# Altium PCB Altium_PCB_pH_Interface_Module_2023-11-09.pcbdoc
Units mil, origin at the board's own origin, x right, y up, seen from the top; angles counter-clockwise.
Board outline 5068.58 x 5931.35 mil, 2 copper layers (Top Layer, Bottom Layer); 50 components, 41 nets, 202 pads, 49 vias.
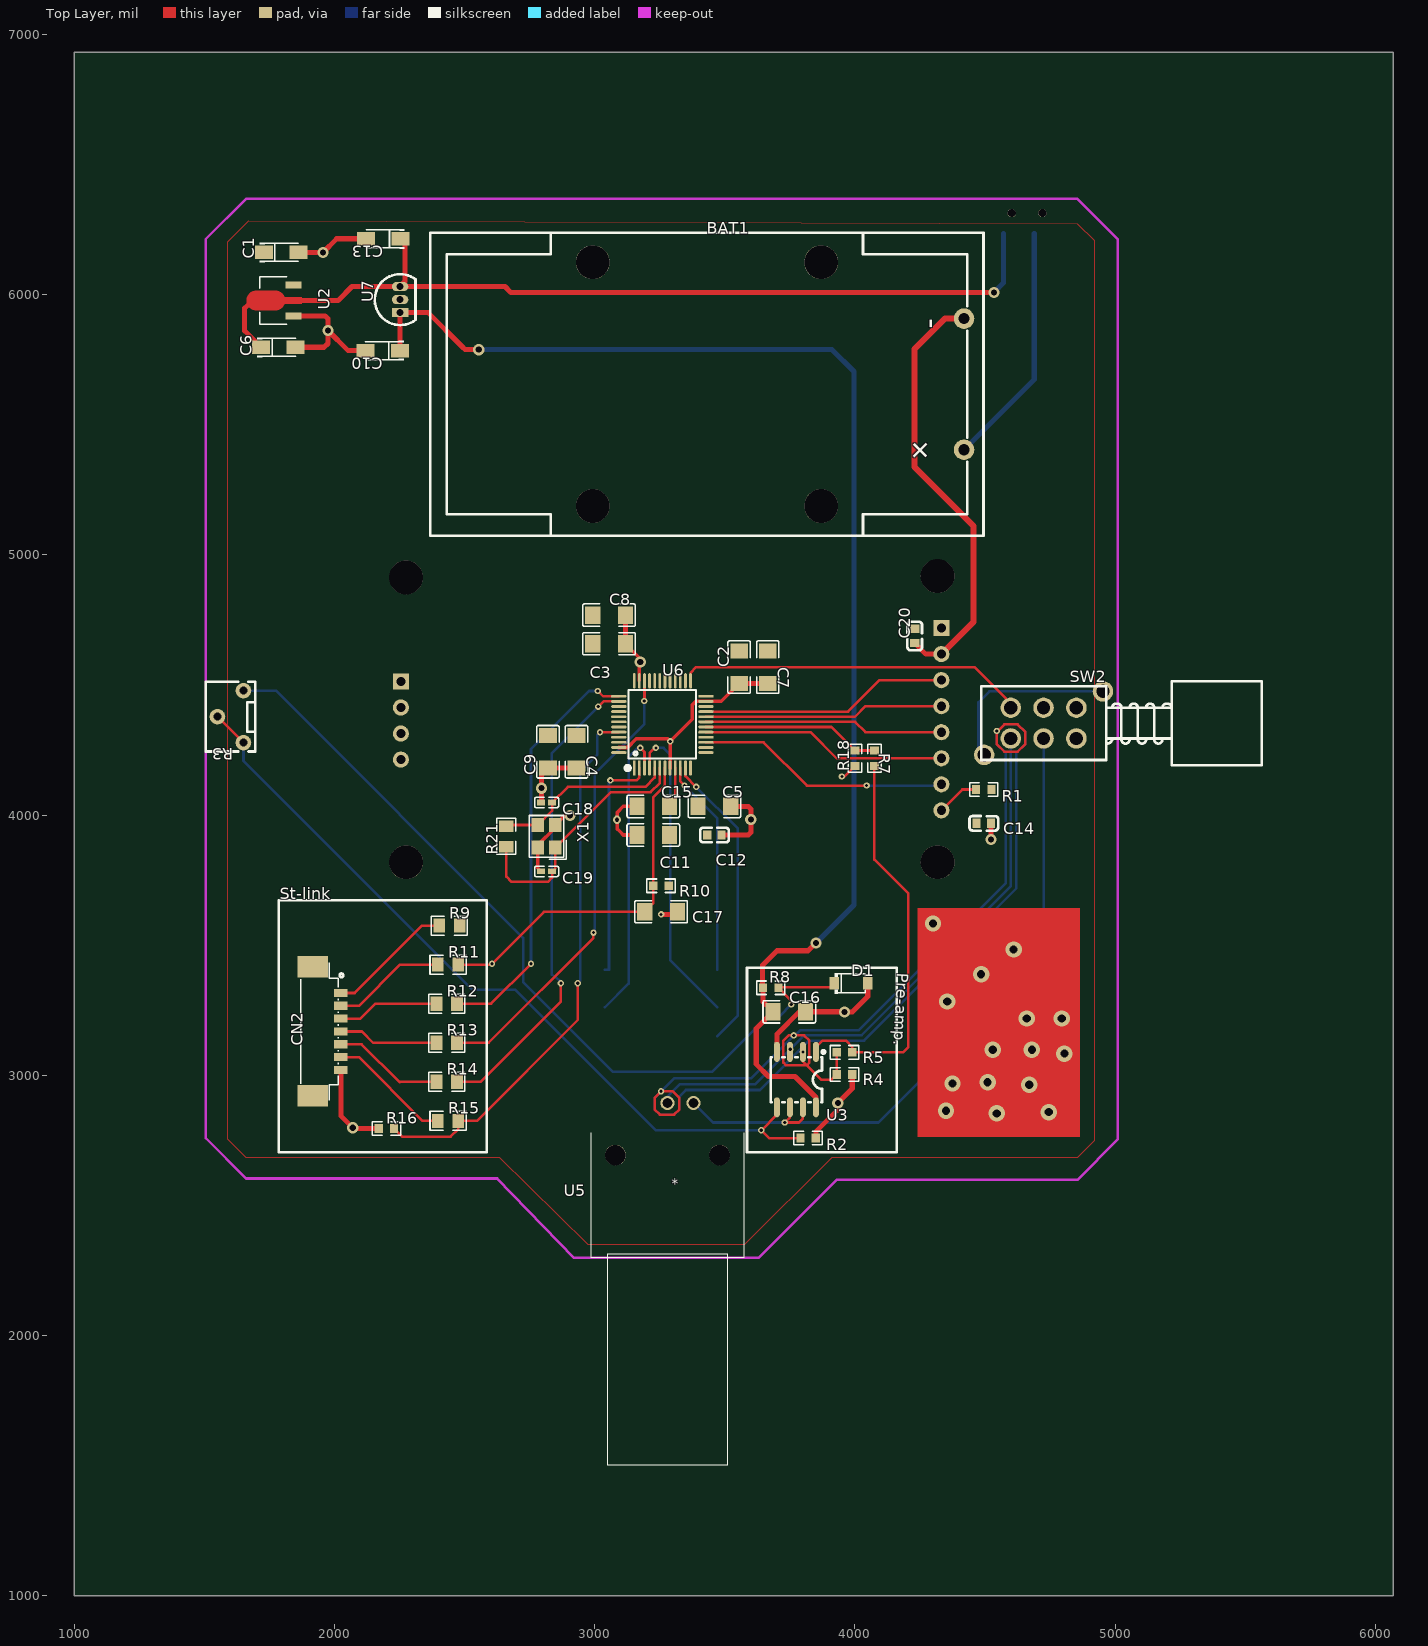
[diagram p0: Top Layer view]
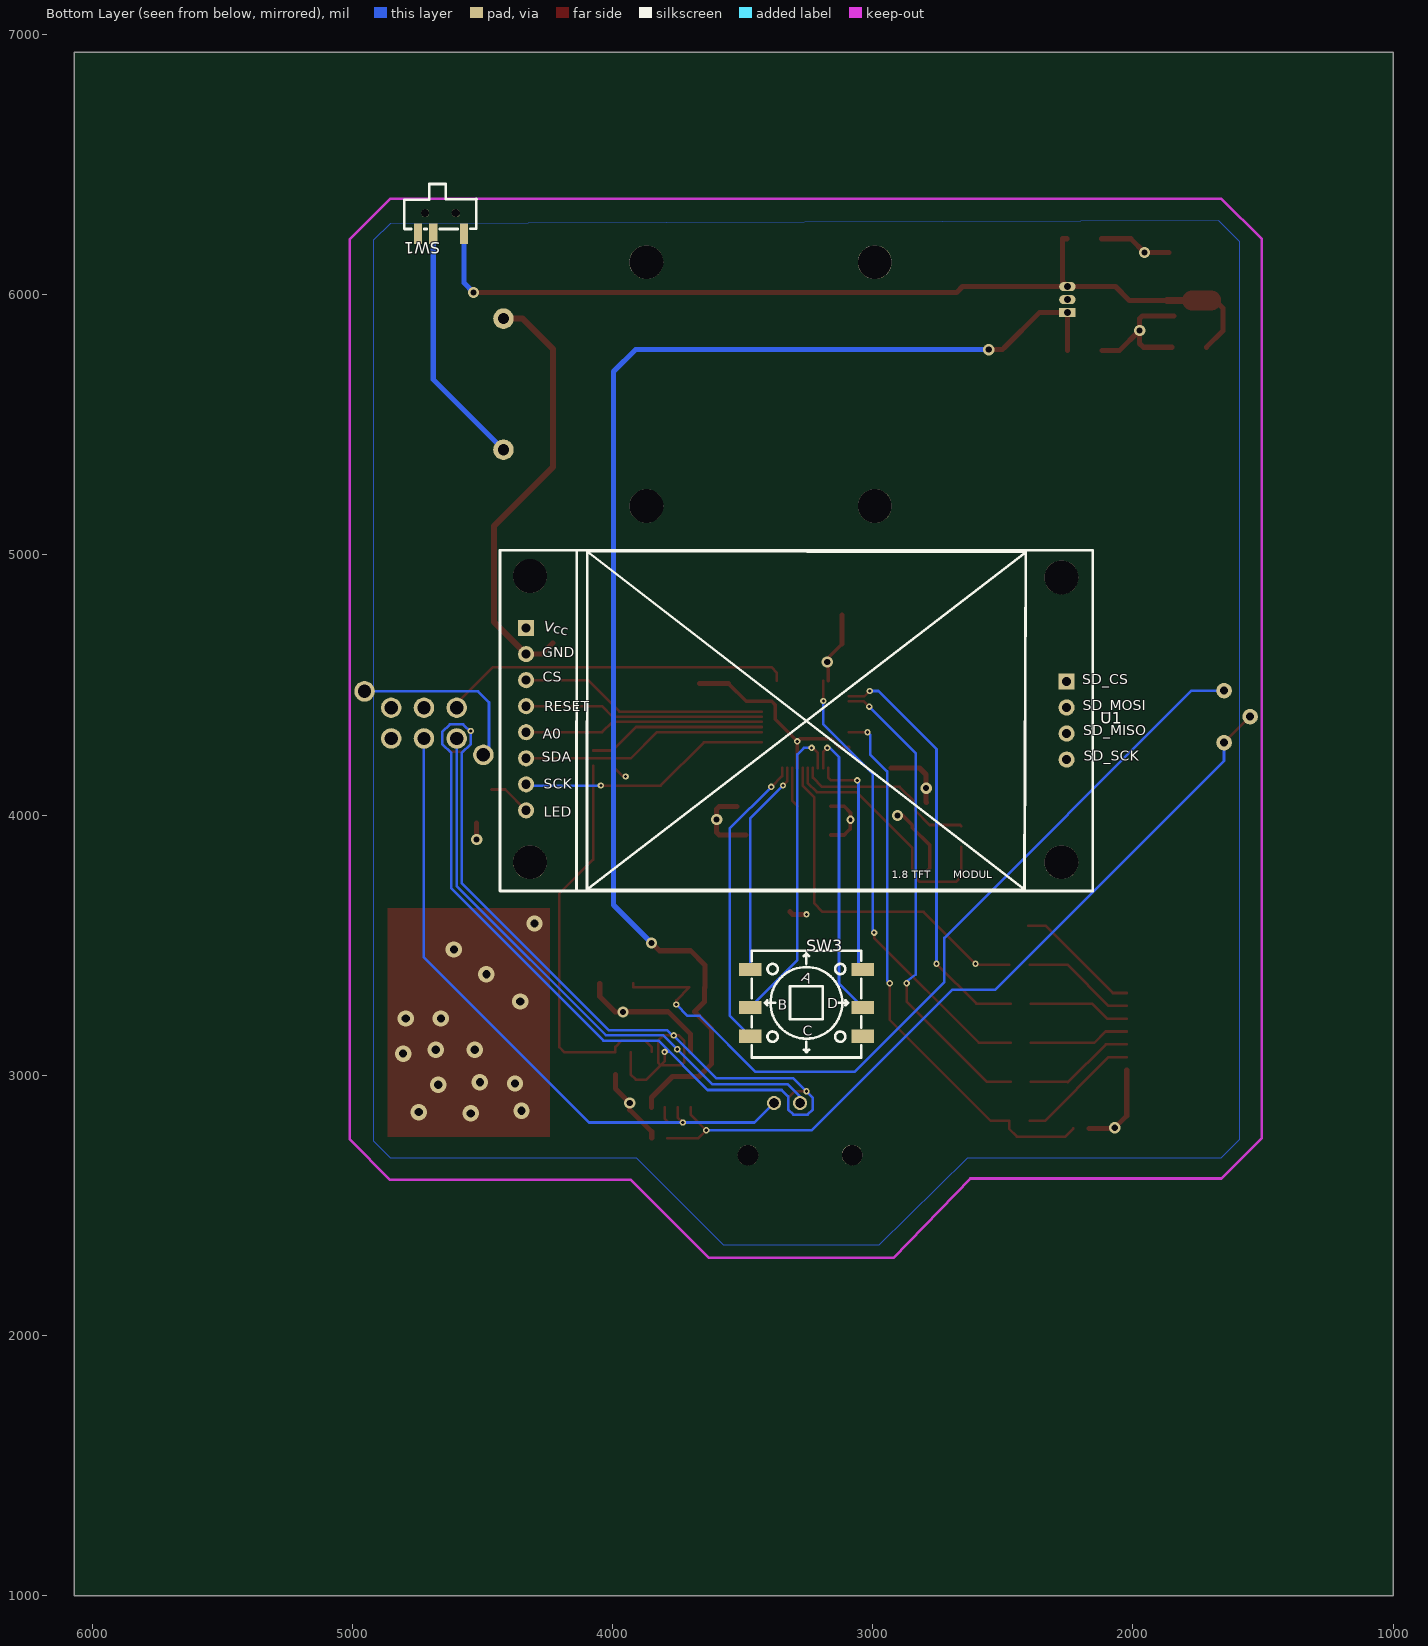
[diagram p1: Bottom Layer view, seen from below]

## Layer stack, top to bottom
Top Layer: signal copper (thickness not stored)
Dielectric: dielectric 12.6, FR-4, Dk 4.8
Bottom Layer: signal copper (thickness not stored)

## Board outline
6068.58,1000 1000,1000 1000,6931.35 6068.58,6931.35

## Components (designator, comment, footprint, x,y, rotation, side; value= is the part's Value field where it differs from the comment)
BAT1 "9V电池盒(BH-1294)" BAT-TH_BH-1294 4419.33,5656.07 r0 top
C1 "10uF" CAP-SMD_L3.2-W1.6-RD-C7171 1794.45,6162.77 r0 top
C2 "100nF" C1206 3555,4568.36 r90 top
C3 "100nF" C1206 3055,4658.36 r180 top
C4 "100nF" C1206 2930,4243.36 r90 top
C5 "100nF" C1206 3460,4033.36 r180 top
C6 "10uF" CAP-SMD_L3.2-W1.6-RD-C7171 1784.45,5797.77 r0 top
C7 "4.7uF" C1206 3665,4568.36 r270 top
C8 "4.7uF" C1206 3055,4768.36 r0 top
C9 "4.7uF" C1206 2820,4243.36 r270 top
C10 "10uF" CAP-SMD_L3.2-W1.6-RD-C7171 2184.69,5784.81 r180 top
C11 "4.7uF" C1206 3225,3923.36 r180 top
C12 "10uF" C0603 3460,3923.36 r180 top
C13 "10uF" CAP-SMD_L3.2-W1.6-RD-C7171 2187.44,6214.73 r180 top
C14 "100nF" C0603 4495,3968.36 r180 top
C15 "100nF" C1206 3225,4033.36 r0 top
C16 "100nF" C1206 3747.68,3243.88 r180 top
C17 "100nF" C1206 3255,3628.36 r180 top
C18 "13pF" C0402 2815,4048.36 r180 top
C19 "13pF" C0402 2815,3783.36 r0 top
C20 "100nF" C0603 4230,4688.36 r90 top
CN2 "53398-0771" CONN-SMD_7P-P1.25_53398-0771 1970,3168.36 r270 top
D1 "LMSZ5223BT1G" SOD-123_L2.7-W1.6-LS3.7-RD 3985,3353.36 r0 top
R1 "100Ω" R0603 4495,4098.36 r180 top
R2 "10kΩ" R0603 3820,2758.36 r180 top
R3 "20kΩ" RES-ADJ-TH_3362X 1600,4378.36 r180 top
R4 "10kΩ" R0603 3960,3003.36 r180 top
R5 "10kΩ" R0603 3960,3088.36 r0 top
R7 "10kΩ" R0603 4075,4218.36 r270 top
R8 "300R" R0603 3676.4,3336.36 r180 top
R9 "22Ω" R0805 2441.15,3574.94 r0 top
R10 "100kΩ" R0603 3255,3728.36 r180 top
R11 "22Ω" R0805 2436.15,3424.94 r0 top
R12 "22Ω" R0805 2431.15,3274.94 r0 top
R13 "22Ω" R0805 2431.15,3124.94 r0 top
R14 "22Ω" R0805 2431.15,2974.94 r0 top
R15 "22Ω" R0805 2436.15,2824.94 r0 top
R16 "10kΩ" R0603 2199.25,2795.45 r0 top
R18 "20kΩ" R0603 4000,4218.36 r270 top
R21 "1MΩ(DNP)" R0805 2660,3918.36 r90 top
SW1 "SSSS810701" SW-SMD_SSSS810701 4659.48,6234.81 r180 bottom
SW2 "PS22F02L-2B1-21" SW-TH_6P_PS22F02L-2B1-21 4725,4353.36 r0 top
SW3 "TM-2027" SW-SMD_6P-P2.80-L10.2-W10.2 3255,3278.36 r0 bottom
U1 "ST7735" "LCD ST7735" 3255,4363.36 r0 bottom
U2 "HT7533-1_C14289" SOT-89-3_L4.5-W2.5-P1.50-LS4.2-BR 1789.45,5977.77 r0 top
U3 "LMC662CMX/NOPB" SOIC-8_L5.0-W4.0-P1.27-LS6.1-BL 3775,2983.36 r180 top
U5 "CONN_CONBN_LNX" CONN_CONBN_LNX 3290,2578.36 r180 top
U6 "STM32F030CCT6" LQFP-48_L7.0-W7.0-P0.50-LS9.0-BL 3260,4348.36 r0 top
U7 "LM78L05ACZ/NOPB" TO-92-3_L4.9-W3.7-P1.27-L 2252.05,5981 r90 top
X1 "16MHz" CRYSTAL-SMD_4P-L3.2-W2.5-BL 2815,3918.36 r90 top

## Footprints (in the part's own frame and the unit in brackets; to place one, negate y for a bottom-side part, rotate by r counter-clockwise, add the part's x,y. Pads: shape width x height; smd on the part's side, far side on the other; paste and mask are expansions set on the pad)
BAT-TH_BH-1294 [mm]
  round 2 hole 1.1 paste+0 mask+0.05: 1(0,-6.4) 2(0,6.4)
  round 3.3 hole 3.3 unplated paste+0: ""(-36.249,-11.9) ""(-36.249,11.9) ""(-13.948,-11.9) ""(-13.948,11.9)
  silkscreen extent -52.1,-14.8 1.9,14.8
C0402 [mm]
  rect 0.79x0.54 smd paste-100 mask+0.051: 1(-0.545,0) 2(0.545,0)
  silkscreen extent -1.17,-0.5 1.17,0.5
C0603 [mm]
  rect 0.8x0.9 smd paste+0 mask+0.051: 1(-0.7,0) 2(0.7,0)
  silkscreen extent -1.41,-0.71 1.39,0.72
C1206 [mm]
  rect 1.485x1.728 smd paste-100 mask+0.051: 1(-1.593,0) 2(1.593,0)
  silkscreen extent -2.56,-1.09 2.56,1.09
CAP-SMD_L3.2-W1.6-RD-C7171 [mil]
  rect 69.19x51.02 smd paste+0 mask+2: 1(-66.39,0) 2(66.39,0)
  silkscreen extent -81,-37 66,37
CONN-SMD_7P-P1.25_53398-0771 [mm]
  rect 0.8x1.3 smd paste+0 mask+0.051: 1(-3.75,1.375) 2(-2.5,1.375) 3(-1.25,1.375) 4(0,1.375) 5(1.25,1.375) 6(2.5,1.375) 7(3.75,1.375)
  rect 2.1x3 smd paste+0 mask+0.051: 8(6.3,-1.375) 9(-6.3,-1.375)
  silkscreen extent -6.73,-2.54 6.73,1.61
CONN_CONBN_LNX [mil]
  round 55 hole 35 slot 35.2 at 0 deg paste+0 mask+2: 1(-89.5,-315) 2(10.5,-315)
  round 79 hole 79 unplated paste+0: ""(-189.5,-115) ""(210.5,-115)
  silkscreen extent -285,-200 305,1076
CRYSTAL-SMD_4P-L3.2-W2.5-BL [mm]
  rect 1.4x1.2 smd paste+0 mask+0.051: 1(-1.1,-0.85) 2(1.1,-0.85) 3(1.1,0.85) 4(-1.1,0.85)
  silkscreen extent -2.26,-1.91 2.03,1.68
"LCD ST7735" [mil]
  rect 62.01x62.01 hole 35 paste+0 mask+2: 1(1077.5,-355) 9(-1000,-150)
  round 62.01 hole 35 paste+0 mask+2: 2(1077.5,-255) 3(1077.5,-155) 4(1077.5,-55) 5(1077.5,45) 6(1077.5,145) 7(1077.5,245) 8(1077.5,345) 10(-1000,-50) 11(-1000,50) 12(-1000,150)
  round 129.92 hole 129.92 unplated paste+0: ""(-980,-550) ""(-980,545) ""(1062.5,-555) ""(1062.5,545)
  silkscreen extent -1100,-655 1178,655
LQFP-48_L7.0-W7.0-P0.50-LS9.0-BL [mm]
  oval 0.27x1.5 smd paste+0 mask+0.05: 1(-2.75,-4.25) 2(-2.25,-4.25) 3(-1.75,-4.25) 4(-1.25,-4.25) 5(-0.75,-4.25) 6(-0.25,-4.25) 7(0.25,-4.25) 8(0.75,-4.25) 9(1.25,-4.25) 10(1.75,-4.25) 11(2.25,-4.25) 12(2.75,-4.25) 25(2.75,4.25) 26(2.25,4.25) 27(1.75,4.25) 28(1.25,4.25) 29(0.75,4.25) 30(0.25,4.25) 31(-0.25,4.25) 32(-0.75,4.25) 33(-1.25,4.25) 34(-1.75,4.25) 35(-2.25,4.25) 36(-2.75,4.25)
  oval 1.5x0.27 smd paste+0 mask+0.05: 13(4.25,-2.75) 14(4.25,-2.25) 15(4.25,-1.75) 16(4.25,-1.25) 17(4.25,-0.75) 18(4.25,-0.25) 19(4.25,0.25) 20(4.25,0.75) 21(4.25,1.25) 22(4.25,1.75) 23(4.25,2.25) 24(4.25,2.75) 37(-4.25,2.75) 38(-4.25,2.25) 39(-4.25,1.75) 40(-4.25,1.25) 41(-4.25,0.75) 42(-4.25,0.25) 43(-4.25,-0.25) 44(-4.25,-0.75) 45(-4.25,-1.25) 46(-4.25,-1.75) 47(-4.25,-2.25) 48(-4.25,-2.75)
  silkscreen extent -3.59,-4.46 3.3,3.34
R0603 [mil]
  rect 31.75x34.02 smd paste-3937.01 mask+2: 1(-29.65,0) 2(29.65,0)
  silkscreen extent -55,-26 55,26
R0805 [mil]
  rect 44.59x54.21 smd paste-3937.01 mask+2: 1(-39.37,0) 2(39.37,0)
  silkscreen extent -69,-36 69,36
RES-ADJ-TH_3362X [mil]
  round 60 hole 30 paste+0 mask+2: 1(-50,-100) 2(50,0) 3(-50,100)
  silkscreen extent -94,-134 94,134
SOD-123_L2.7-W1.6-LS3.7-RD [mm]
  rect 0.91x1.22 smd paste+0 mask+0.051: 1(-1.635,0) 2(1.635,0)
  silkscreen extent -1.6,-1 1.38,1
SOIC-8_L5.0-W4.0-P1.27-LS6.1-BL [mil]
  oval 22.38x76.78 smd paste+0 mask+2: 1(-75,-106.5) 2(-25,-106.5) 3(25,-106.5) 4(75,-106.5) 5(75,106.5) 6(25,106.5) 7(-25,106.5) 8(-75,106.5)
  silkscreen extent -110,-112 98,87
SOT-89-3_L4.5-W2.5-P1.50-LS4.2-BR [mm]
  rect 1.575x0.672 smd paste+0 mask+0.051: 1(1.356,-1.5) 3(1.356,1.5)
  Top Layer region: -2.283,0.95 -0.429,0.95 -0.384,0.949 -0.34,0.946 -0.296,0.94 -0.252,0.933 -0.208,0.924 -0.165,0.912 -0.123,0.899 -0.081,0.884 -0.04,0.866 0,0.847 0.04,0.826 0.078,0.803 0.115,0.779 0.151,0.752 0.185,0.724 0.219,0.695 0.251,0.664 0.281,0.631 0.31,0.597 0.337,0.562 0.362,0.525 0.386,0.488 0.408,0.449 0.428,0.409 0.447,0.33 2.144,0.33 2.144,-0.33 0.447,-0.33 0.428,-0.409 0.408,-0.449 0.386,-0.488 0.362,-0.526 0.337,-0.562 0.31,-0.597 0.281,-0.631 0.251,-0.664 0.219,-0.695 0.185,-0.725 0.151,-0.753 0.115,-0.779 0.078,-0.804 0.04,-0.827 0,-0.848 -0.04,-0.867 -0.081,-0.884 -0.123,-0.899 -0.165,-0.913 -0.208,-0.924 -0.252,-0.934 -0.296,-0.941 -0.34,-0.946 -0.384,-0.949 -0.429,-0.95 -2.283,-0.95 -2.328,-0.949 -2.372,-0.946 -2.416,-0.941 -2.46,-0.934 -2.504,-0.924 -2.547,-0.913 -2.589,-0.899 -2.631,-0.884 -2.672,-0.867 -2.713,-0.848 -2.752,-0.827 -2.79,-0.804 -2.827,-0.779 -2.863,-0.753 -2.898,-0.725 -2.931,-0.695 -2.963,-0.664 -2.993,-0.631 -3.022,-0.597 -3.049,-0.562 -3.075,-0.526 -3.098,-0.488 -3.12,-0.449 -3.141,-0.409 -3.159,-0.369 -3.175,-0.327 -3.189,-0.285 -3.202,-0.242 -3.212,-0.199 -3.22,-0.155 -3.227,-0.111 -3.231,-0.067 -3.233,-0.022 -3.233,0.022 -3.231,0.067 -3.227,0.111 -3.22,0.155 -3.212,0.199 -3.202,0.242 -3.189,0.285 -3.175,0.327 -3.159,0.369 -3.141,0.409 -3.12,0.449 -3.098,0.488 -3.075,0.525 -3.049,0.562 -3.022,0.597 -2.993,0.631 -2.963,0.664 -2.931,0.695 -2.898,0.724 -2.863,0.752 -2.827,0.779 -2.79,0.803 -2.752,0.826 -2.713,0.847 -2.672,0.866 -2.631,0.884 -2.589,0.899 -2.547,0.912 -2.504,0.924 -2.46,0.933 -2.416,0.94 -2.372,0.946 -2.328,0.949
  silkscreen extent -1.95,-2.33 0.7,2.33
SW-SMD_6P-P2.80-L10.2-W10.2 [mm]
  rect 2.2x1.3 smd paste+0 mask+0.051: 1(5.5,-3.25) 2(5.5,0.45) 3(5.5,3.25) 4(-5.5,3.25) 5(-5.5,0.45) 6(-5.5,-3.25)
  silkscreen extent -5.35,-5.08 5.33,5.33
SW-SMD_SSSS810701 [mm]
  rect 0.8x2 smd paste+0 mask+0.051: 1(2.25,0) 2(-0.75,0) 3(-2.25,0)
  round 0.8 hole 0.8 unplated paste+0: ""(-1.552,2.003) ""(1.45,2)
  silkscreen extent -3.59,0.44 3.47,4.86
SW-TH_6P_PS22F02L-2B1-21 [mm]
  round 2 hole 1.3 paste+0 mask+0.051: 1(-3.2,-1.5) 2(0,-1.5) 3(3.2,-1.5) 4(-3.2,1.5) 5(0,1.5) 6(3.2,1.5) M(-5.8,-3.1) M(5.8,3.1)
  silkscreen extent -6.1,-4.1 21.3,4.1
TO-92-3_L4.9-W3.7-P1.27-L [mm]
  rect 0.9x1.6 hole 0.7 paste+0 mask+0.051: 1(-1.27,0)
  oval 0.9x1.6 hole 0.7 paste+0 mask+0.051: 2(0,0) 3(1.27,0)
  silkscreen extent -2.48,-1.5 2.48,2.48

## Free pads (board coordinates)
  round 24.41 hole 12.2 paste+0 mask+2: ""(3255,2938.36) ""(3730,2818.36) ""(3751.22,3099.78) ""(3765,3153.36) ""(3800,3089.86) ""(4545,4323.36)

## Via types
v1: diameter 24.41, hole 12.2, Top Layer to Bottom Layer, tented both sides, 20 vias
v2: diameter 62.99, hole 31.5, Top Layer to Bottom Layer, tented both sides, 15 vias
v3: diameter 43.31, hole 23.62, Top Layer to Bottom Layer, tented both sides, 13 vias
v4: diameter 31.5, hole 15.75, Top Layer to Bottom Layer, tented both sides, 1 vias

## Nets (pads, with @x,y where several pads share a name; then routed paths per layer and width w, separated by ;. In a path a pad name is that pad's centre, name@x,y a point inside that pad or via, vN(x,y) a via of type N, cw(c..) or ccw(c..) an arc to the next point about the centre after c; other vN are vias at no path point)
3.3V: C1.1 C2.2 C3.2 C4.2 C5.2 C7.1 C8.1 C9.1 C11.1 C12.2 C14.2 C15.2 C20.2 R1.1 R9.2 R10.1 U1.1 U2.3 U6.1 U6.9 U6.24 U6.36 U6.48 | length 156.6
  Top Layer w10: C15.2 3309.21,4054.87 U6.9
+5V: C10.1 C16.2 R8.2 U3.8 U7.1 | length 5222.8
  Top Layer w19.68: C10.1@2251.1,5784.86 U7.1 ; U7.1 2359.82,5931 2491.86,5798.96 ; 2491.81,5798.99 2502.01,5788.79 v3(2554.41,5788.79) ; R8.2@3645.34,3338.36 3645.34,3423.7 3700,3478.36 3820,3478.36 v3(3850,3508.36) ; R8.2@3646.76,3336.39 3646.76,3282.09 C16.2 3620.51,3179.4 3620.51,3042.69 3667.75,2995.45 3769.33,2995.45 3850,2914.78 U3.8
  Bottom Layer w19.68: v3(2554.41,5788.79) 3912.2,5788.76 3996.1,5704.86 3996.1,5678.16 ; v3(3850,3508.36) 3996.1,3654.46 3996.1,5678.36
ADC1_IN8: R5.2 R7.2 U3.1 | length 1556.8
  Top Layer w10: U3.1 3850,3108.36 3875,3133.36 3965,3133.36 3989.7,3108.66 R5.2 4185,3088.36 4205,3108.36 4205,3698.36 4075,3828.36 R7.2
BLTX: R14.2 U6.38 | length 1838.9
  Top Layer w10: R14.2 2561.58,2974.94 2870,3283.36 v1(2870,3353.36) ; v1(3013.82,4416.71) 3034.05,4436.94 U6.38
  Bottom Layer w10: v1(2870,3353.36) 2868.7,3361.86 2835,3386.96 2835,4237.89 v1(3013.82,4416.71)
BOOT0: R15.2 R16.2 U6.44 | length 2136.4
  Top Layer w10: R16.2@2228.9,2795.46 2260,2764.36 2445.6,2764.36 2475.5,2794.36 R15.2@2475.5,2825.36 ; R15.2@2475.5,2824.96 2546.6,2824.96 2935,3213.36 v1(2935,3353.36) ; v1(3020,4318.36) 3020.47,4318.83 U6.44
  Bottom Layer w10: v1(2935,3353.36) 2945,3363.36 2945,4168.36 3010,4233.36 3010,4308.36 v1(3020,4318.36)
D1_1: D1.1 R3.1 R8.1 | length 3237
  Top Layer w10: v1(3755.16,3271.83) 3755.16,3287.86 3704.66,3338.36 3920.63,3338.36 D1.1
  Bottom Layer w10: R3.1 1775,4478.36 2725,3528.36 2725,3358.36 3070,3013.36 3450,3013.36 3665,3228.36 3711.69,3228.36 v1(3755.16,3271.83)
DOWN: SW3.3 U6.11 | length 1146.6
  Top Layer w10: U6.11 3348.58,4149.78 v1(3390,4108.36)
  Bottom Layer w10: v1(3390,4108.36) 3550,3948.36 3550,3228.88 SW3.3
GND: BAT1.2 C1.2 C2.1 C3.1 C4.1 C5.1 C6.2 C7.2 C8.2 C9.2 C10.2 C11.2 C12.1 C13.2 C14.1 C15.1 C16.1 C17.1 C18.2 C19.1 C20.1 CN2.7 D1.2 R2.1 R4.1 R16.1 R18.2 SW2.5 SW3.4 U1.2 U2.1 U3.4 U6.8 U6.23 U6.35 U6.47 U7.2 X1.2 X1.4 | length 6019
  Top Layer w10: v1(3950,4148.36) 3959.66,4148.36 R18.2
  Top Layer w13.78: X1.4 2781.5,3884.86 2848.5,3951.86 X1.2 2885.2,3998.36 v3(2905,3998.36) ; X1.4 2781.53,3795.37 C19.1 ; v4(3085.75,3981.91) 3085.75,4009.11 3110,4033.36 C15.1 ; v4(3085.75,3981.91) 3085.8,3947.66 3097.8,3935.56 3110,3923.36 C11.2 ; U6.47 3126.4,4259.76 3160,4293.36 3280,4293.36 v1(3290,4283.36) ; C3.1 3175,4601.06 v3(3175,4588.36) 3171.42,4584.78 U6.35 ; U6.8@3289.5,4181.06 3290,4181.56 v1(3290,4283.36) ; C2.1 3486.28,4436.94 U6.23 3388.6,4436.96 3375,4423.36 3375,4368.36 v1(3290,4283.36)
  Top Layer w19.68: U2.1 1963.5,5918.72 1974.45,5907.77 v3(1974.45,5862.77) ; C6.2@1850.85,5797.77 1959.45,5797.77 1974.45,5812.77 v3(1974.45,5862.77) ; C1.2 1861.63,6161.97 v3(1955.55,6161.98) ; v3(1955.55,6161.98) 2008.31,6214.73 C13.2 ; CN2.7 2024.13,2844.23 v3(2070,2798.36) 2072.91,2795.45 R16.1@2169.59,2795.45 ; C10.2 2052.4,5784.81 v3@1974.45,5862.77 ; C18.2 2795,4049.82 v3(2795,4103.36) 2795,4155.66 C9.2 C4.1 ; C3.1 C8.2 ; v1(3255,3618.36) 3307.7,3618.36 C17.1 ; C12.1 3590,3923.36 3600,3933.36 v3(3600,3983.36) 3600,4023.36 3590,4033.36 C5.1 ; C2.1 C7.2 ; U3.4 3700,3157.66 3786.3,3243.86 C16.1 3959.49,3243.87 v3(3960,3243.36) 3990,3243.36 4049.37,3302.73 D1.2 ; R2.1 3849.7,2782.86 3934.3,2867.46 v3(3934.29,2893.48) 3989.5,2948.66 R4.1@3989.5,3003.36 ; C20.1 4272.44,4618.36 U1.2 ; v3(4522.56,3905.8) C14.1
  Top Layer w23.62: U1.2 4456.3,4742.16 4456.3,5110.76 4229.6,5337.56 4229.6,5791.46 4346.1,5908.06 BAT1.2@4419.3,5908.06
  other v2: 4545,2853.36 4745,2858.36 4350,2863.36 4670,2963.36 4375,2968.36 4510,2973.36 4805,3083.36 4530,3098.36 4680,3098.36 4660,3218.36 4795,3218.36 4355,3283.36 4485,3388.36 4610,3483.36 4300,3583.36
LEFT: SW3.2 U6.4 | length 1203.5
  Top Layer w10: U6.4@3210.8,4181.06 3210.8,4239.16 3230,4258.36 v1(3235,4258.36)
  Bottom Layer w10: v1(3235,4258.36) 3265,4258.36 3290,4233.36 3290,3442.17 SW3.2
NRST: C17.2 R10.2 R11.2 U6.7 | length 1385.7
  Top Layer w10: R11.2 2601.58,3424.94 v1(2605,3428.36) 2805,3628.36 C17.2 3225.34,3661.4 R10.2 ; R10.2 3225.3,4068.66 3269.8,4113.56 U6.7@3269.8,4181.06
OPAMP-CALIB: SW2.4 U6.25 | length 1345.2
  Top Layer w10: U6.25 3368.3,4546.66 3390,4568.36 4460,4568.36 4599,4429.36 SW2.4@4599,4412.46
OSC-IN: C18.1 R21.2 U6.5 X1.3 | length 703.4
  Top Layer w10: R21.2 2663.94,3961.67 X1.3 2836.46,4016.6 C18.1 ; C18.1 2896.5,4108.36 3195,4108.36 3230.5,4143.86 U6.5@3230.5,4181.06
OSC-OUT: C19.2 R21.1 U6.6 X1.1 | length 989.5
  Top Layer w10: R21.1 2660,3763.36 2680,3743.36 2820,3743.36 2836.4,3759.66 C19.2 ; C19.2 2848.46,3795.36 X1.1 ; X1.1 3061.8,4088.36 3215,4088.36 3250.2,4123.56 U6.6@3250.2,4181.06
PH+: pad.@3751.22,3099.78 SW2.1 U3.3 U5.2 | length 2246.1
  Bottom Layer w10: U5.2 3279.5,2917.96 3327.1,2965.56 3617,2965.56 pad.@3751.22,3099.78 ; pad.@3751.2,3099.76 3805,3153.36 4025.4,3153.76 4599,3727.36 SW2.1
PH-: pad.@3730,2818.36 SW2.2 U3.6 U3.7 U5.1 | length 2667
  Top Layer w10: U3.6 3750,2838.36 3730,2818.36 3785,2818.36 3800,2833.36 U3.7
  Bottom Layer w10: U5.1 3454.5,2818.36 3730,2818.36 4090,2818.36 4725,3453.36 SW2.2
R1_2: R1.2 U1.8 | length 166
  Top Layer w10: U1.8 4412.5,4098.36 R1.2
R2_2: R2.2 R3.2 R3.3 U3.5 | length 3065.7
  Top Layer w10: R3.2 R3.3 ; U3.5 3700,2848.36 v1(3640,2788.36) 3670,2758.36 R2.2
  Bottom Layer w10: R3.3 1650,4208.36 2530,3328.36 2695,3328.36 3235,2788.36 v1(3640,2788.36)
R4_2: pad.@3255,2938.36 pad.@3765,3153.36 pad.@3800,3089.86 pad.@4545,4323.36 R4.2 R5.1 U3.2 | length 6249.2
  Top Layer w10: U3.2 3800,3053.36 3870,2983.36 3910,2983.36 R4.2 ; R4.2 R5.1 ; 3230,2868.36 3230,2903.36 3230,2913.36 3255,2938.36 3300,2938.36 3325,2913.36 3325,2868.36 3305,2848.36 3250,2848.36 3230,2868.36 ; 3725,3048.36 3725,3133.36 3745,3153.36 3805,3153.36 3825,3133.36 3825,3048.36 3815,3038.36 3735,3038.36 3725,3048.36 ; 4545,4273.36 4575,4243.36 4625,4243.36 4655,4273.36 4655,4318.36 4625,4348.36 4575,4348.36 4550,4323.36 4545,4323.36 4545,4273.36
  Bottom Layer w10: 3781.6,3090.26 pad.@3800,3089.86 ; 3824.2,3132.86 3634.7,2943.36 3350,2943.36 3325,2918.36 3325,2868.36 3305.3,2848.66 3250,2848.66 3230,2868.66 3230,2903.36 3230,2913.36 3255,2938.36 3305,2988.36 3600,2988.36 3765,3153.36 3770,3153.36 3790,3173.36 4015,3173.36 4580,3738.36 4580,4238.36 4545,4273.36 4545,4318.36 4575,4348.36 4625,4348.36 4655,4318.36 4655,4273.36 4620,4238.36 4620,3718.36 4035,3133.36 3825,3133.36
R9_1: CN2.1 R9.1 | length 485
  Top Layer w10: CN2.1 2077.6,3315.96 2336.6,3574.96 R9.1@2401.8,3574.96
R11_1: CN2.2 R11.1 | length 438.2
  Top Layer w10: CN2.2 2093.4,3266.76 2251.6,3424.96 R11.1@2396.8,3424.96
R12_1: CN2.3 R12.1 | length 391.4
  Top Layer w10: CN2.3 2099.21,3217.57 2156.58,3274.94 R12.1
R13_1: CN2.4 R13.1 | length 385.7
  Top Layer w10: CN2.4 2105,3168.36 2148.4,3124.96 R13.1@2391.8,3124.96
R14_1: CN2.5 R14.1 | length 428.7
  Top Layer w10: CN2.5 2104.21,3119.15 2250,2973.36 2251.58,2974.94 R14.1
R15_1: CN2.6 R15.1 | length 474.1
  Top Layer w10: CN2.6 2093.42,3069.94 2338.42,2824.94 R15.1
RIGHT: SW3.5 U6.3 | length 1144.1
  Top Layer w10: v1(3175,4258.36) 3191.1,4242.26 U6.3
  Bottom Layer w10: SW3.5@3038.5,3260.66 3130,3352.16 3130,4223.36 3165,4258.36 v1(3175,4258.36)
S$66725: 
S$66729: 
S$66742: 
SEL: SW3.6 U6.2 | length 898.1
  Top Layer w10: v1(3060,4133.36) 3160,4133.36 3171.42,4144.78 U6.2
  Bottom Layer w10: SW3.6 3055,3406.26 3055,4128.36 v1(3060,4133.36)
SPI1-MOSI: U1.6 U6.17 | length 946.8
  Top Layer w10: U6.17@3427.3,4318.86 3829.5,4318.86 3930,4218.36 U1.6
SPI1-SCK: U1.7 U6.15 | length 976.1
  Top Layer w10: U6.15 3648.9,4279.46 3815,4113.36 v1(4045,4113.36)
  Bottom Layer w10: v1(4045,4113.36) 4327.5,4113.36 U1.7
ST7735-AD: U1.5 U6.19 | length 921.7
  Top Layer w10: U6.19 4000.2,4358.16 4040,4318.36 U1.5
ST7735-CS: U1.3 U6.21 | length 955.2
  Top Layer w10: U6.21 3974.2,4397.56 4095,4518.36 U1.3
ST7735-RESET: U1.4 U6.20 | length 922
  Top Layer w10: U6.20 3999.5,4377.86 4040,4418.36 U1.4
SW2_M: SW2.M | length 706.8
  Bottom Layer w10: SW2.M@4496.7,4231.26 4475,4252.96 4475,4433.36 4517,4475.36 SW2.M@4953.3,4475.36
SWCLK: R12.2 U6.37 | length 1611.7
  Top Layer w10: R12.2@2470.5,3274.96 2601.6,3274.96 v1(2755,3428.36) ; v1(3011.85,4476.94) 3032.16,4456.63 U6.37
  Bottom Layer w10: v1(2755,3428.36) 2755,4253.36 2978.58,4476.94 v1(3011.85,4476.94)
SWDIO: R13.2 U6.34 | length 1763.1
  Top Layer w10: R13.2 2591.58,3124.94 2995,3528.36 v1(2995,3548.36) ; v1(3190,4438.36) 3191.1,4439.46 U6.34
  Bottom Layer w10: v1(2995,3548.36) 3000,3548.36 3000,4158.36 3190,4348.36 v1(3190,4438.36)
U2_2: C6.1 C13.1 SW1.1 U7.3 | length 3550.7
  Top Layer w19.68: C6.1@1718.05,5797.77 1654.45,5861.37 1654.45,5947.66 1684.75,5977.97 1736.05,5977.77 2013.85,5977.76 2067.1,6031 U7.3 ; C13.1@2253.8,6214.76 2271.3,6214.76 2271.3,6050.26 U7.3 2655.1,6030.96 2677.62,6008.44 4534.29,6008.44 v3(4534.29,6008.83)
  Bottom Layer w19.68: v3(4534.29,6008.83) 4570.91,6045.45 SW1.1
U6_18: R7.1 R18.1 U6.18 | length 685.2
  Top Layer w10: U6.18 3909.5,4338.52 R18.1 R7.1
UP: SW3.1 U6.10 | length 833.8
  Top Layer w10: U6.10 3328.9,4129.46 v1(3345,4113.36)
  Bottom Layer w10: v1(3345,4113.36) 3471.53,3986.83 SW3.1
VBAT: BAT1.1 SW1.2 | length 942.4
  Bottom Layer w19.68: BAT1.1 4689.02,5673.79 SW1.2
pads on no net: BAT1. CN2.8 CN2.9 SW1. SW1.3 SW2.3 SW2.6 U1. U1.9 U1.10 U1.11 U1.12 U5. U6.12 U6.13 U6.14 U6.16 U6.22 U6.26 U6.27 U6.28 U6.29 U6.30 U6.31 U6.32 U6.33 U6.39 U6.40 U6.41 U6.42 U6.43 U6.45 U6.46

## Polygon pours and split planes (outlines as drawn)
GND on Bottom Layer (solid): 1590,6203.36 1670,6283.36 4855,6273.36 4920,6208.36 4920,2748.36 4855,2683.36 3910,2683.36 3575,2348.36 2975,2348.36 2635,2683.36 1660,2683.36 1590,2753.36 1590,6203.36
3.3V on Top Layer (solid): 1590,6203.36 1670,6283.36 4855,6273.36 4920,6208.36 4920,2748.36 4855,2683.36 3910,2683.36 3575,2348.36 2975,2348.36 2635,2683.36 1660,2683.36 1590,2753.36 1590,6203.36

## Other copper
Top Layer:
  rectangle net GND: 4240,2763.36 4865,3643.36

## Silkscreen, mask and mechanical layers (free items; w line width, h text height)
Top Overlay:
  lines w10: 1785,2703.36 2585,2703.36 2585,3673.36 1785,3673.36 1785,2703.36 ; 3585,2703.36 4160,2703.36 4160,3413.36 3585,3413.36 3585,2703.36
  text "St-link" at 1790,3675.86 h45
  text "Pre-amp." at 4162.53,3394.54 h45 r267
Top Solder:
  lines w14: 3230,2868.36 3230,2903.36 ; 3230,2868.36 3250,2848.36 ; 3230,2868.36 3230,2903.36 ; 3230,2868.36 3250,2848.36 ; 3230,2903.36 3230,2913.36 ; 3230,2903.36 3230,2913.36 ; 3230,2913.36 3255,2938.36 ; 3230,2913.36 3255,2938.36 ; 3250,2848.36 3305,2848.36 ; 3250,2848.36 3305,2848.36 ; 3250,2848.36 3305,2848.36 ; 3255,2938.36 3300,2938.36 3325,2913.36 ; 3305,2848.36 3325,2868.36 ; 3305,2848.36 3325,2868.36 ; 3325,2868.36 3325,2913.36 ; 3325,2868.36 3325,2913.36 ; 3725,3048.36 3725,3133.36 3745,3153.36 3805,3153.36 3825,3133.36 3825,3048.36 3815,3038.36 3735,3038.36 3725,3048.36 ; 4545,4273.36 4575,4243.36 4625,4243.36 4655,4273.36 4655,4318.36 4625,4348.36 4575,4348.36 4550,4323.36 4545,4323.36 4545,4273.36
Bottom Solder:
  lines w14: 3327.5,2965.96 3279.5,2917.96 ; 3622.2,2965.56 3327.1,2965.56 ; 3751.2,3099.76 3805,3153.36 4025.4,3153.76 4599,3727.36 ; 3751.22,3099.78 3617,2965.56 3327.1,2965.56 ; 3765,3148.36 3790,3173.36 4015,3173.36 4580,3738.36 4580,4238.36 4545,4273.36 4545,4318.36 4575,4348.36 4625,4348.36 4655,4318.36 4655,4273.36 4620,4238.36 4620,3718.36 4035,3133.36 3825,3133.36 ; 3765,3153.36 3755,3143.36 3600,2988.36 3305,2988.36 3255,2938.36 3230,2913.36 3230,2903.36 ; 3781.6,3090.26 3800,3089.86 ; 4025,3153.36 4599,3727.36 ; 3230,2868.66 3250,2848.66 ; 3230,2868.66 3230,2903.36 ; 3230,2868.66 3250,2848.66 ; 3230,2868.66 3230,2903.36 ; 3230,2868.66 3230,2903.36 ; 3230,2868.66 3250,2848.66 ; 3230,2903.36 3230,2903.36 ; 3250,2848.66 3305.3,2848.66 ; 3250,2848.66 3305.3,2848.66 ; 3250,2848.66 3305.3,2848.66 ; 3279.5,2893.36 3279.5,2917.96 ; 3279.5,2893.36 3279.5,2917.96 ; 3279.5,2893.36 3279.5,2917.96 ; 3279.5,2917.96 3327.1,2965.56 ; 3279.5,2917.96 3327.1,2965.56 ; 3305.3,2848.66 3325,2868.36 ; 3305.3,2848.66 3325,2868.36 ; 3305.3,2848.66 3325,2868.36 ; 3325,2868.36 3325,2918.36 ; 3325,2868.36 3325,2918.36 ; 3325,2918.36 3350,2943.36 ; 3325,2918.36 3350,2943.36 ; 3350,2943.36 3634.7,2943.36 ; 3350,2943.36 3634.7,2943.36 ; 3634.7,2943.36 3824.2,3132.86 3634.7,2943.36 ; 4599,3727.36 4599,4294.26 4599,3727.36

## Text inside footprints (layer, text, board x,y; h text height)
BAT1: Top Overlay "+" at 4309.48,5394.36 h80 r135; Top Overlay "-" at 4321.2,5870.01 h80 r90
SW3: Bottom Overlay "B" at 3365.01,3252.18 h39.37; Bottom Overlay "A" at 3277.06,3363.48 h39.37 r21; Bottom Overlay "D" at 3175.01,3257.18 h39.37; Bottom Overlay "C" at 3270.01,3152.18 h39.37
U1: Bottom Overlay "MODUL" at 2689.95,3757.32 h30; Bottom Overlay "1.8 TFT" at 2926.25,3757.32 h30; Bottom Overlay "LED" at 4264.65,3993.24 h39.37; Bottom Overlay "SCK" at 4265.05,4101.44 h39.37; Bottom Overlay "SDA" at 4272.55,4204.64 h39.37; Bottom Overlay "A0" at 4267.5,4293.68 h39.37; Bottom Overlay "RESET" at 4262.5,4398.68 h39.37; Bottom Overlay "CS" at 4268.05,4511.54 h39.37; Bottom Overlay "GND" at 4270.55,4606.94 h39.37; Bottom Overlay "Vcc" at 4266.24,4709.27 h39.37 r12; Bottom Overlay "SD_CS" at 2195,4503.68 h39.37; Bottom Overlay "SD_MOSI" at 2193.05,4401.94 h39.37; Bottom Overlay "SD_MISO" at 2190.55,4306.54 h39.37; Bottom Overlay "SD_SCK" at 2190,4208.68 h39.37
U5: Document "Copyright 2021 Accelerated Designs. All rights reserved." at 3391.5,2602.36 h5 r180; Document "*" at 3278.38,2589.72 h39.37 r301; Top Overlay "*" at 3278.38,2589.72 h39.37 r301